# Altium PCB be_mdv.PcbDoc (part 1 of 2)
Units mm, origin at the board's own origin, x right, y up, seen from the top; angles counter-clockwise.
Board outline 120 x 100 mm, 4 copper layers (Top Layer, GND, Signal, Bottom Layer), stack 1.781 mm thick; 140 components, 157 nets, 731 pads, 195 vias.
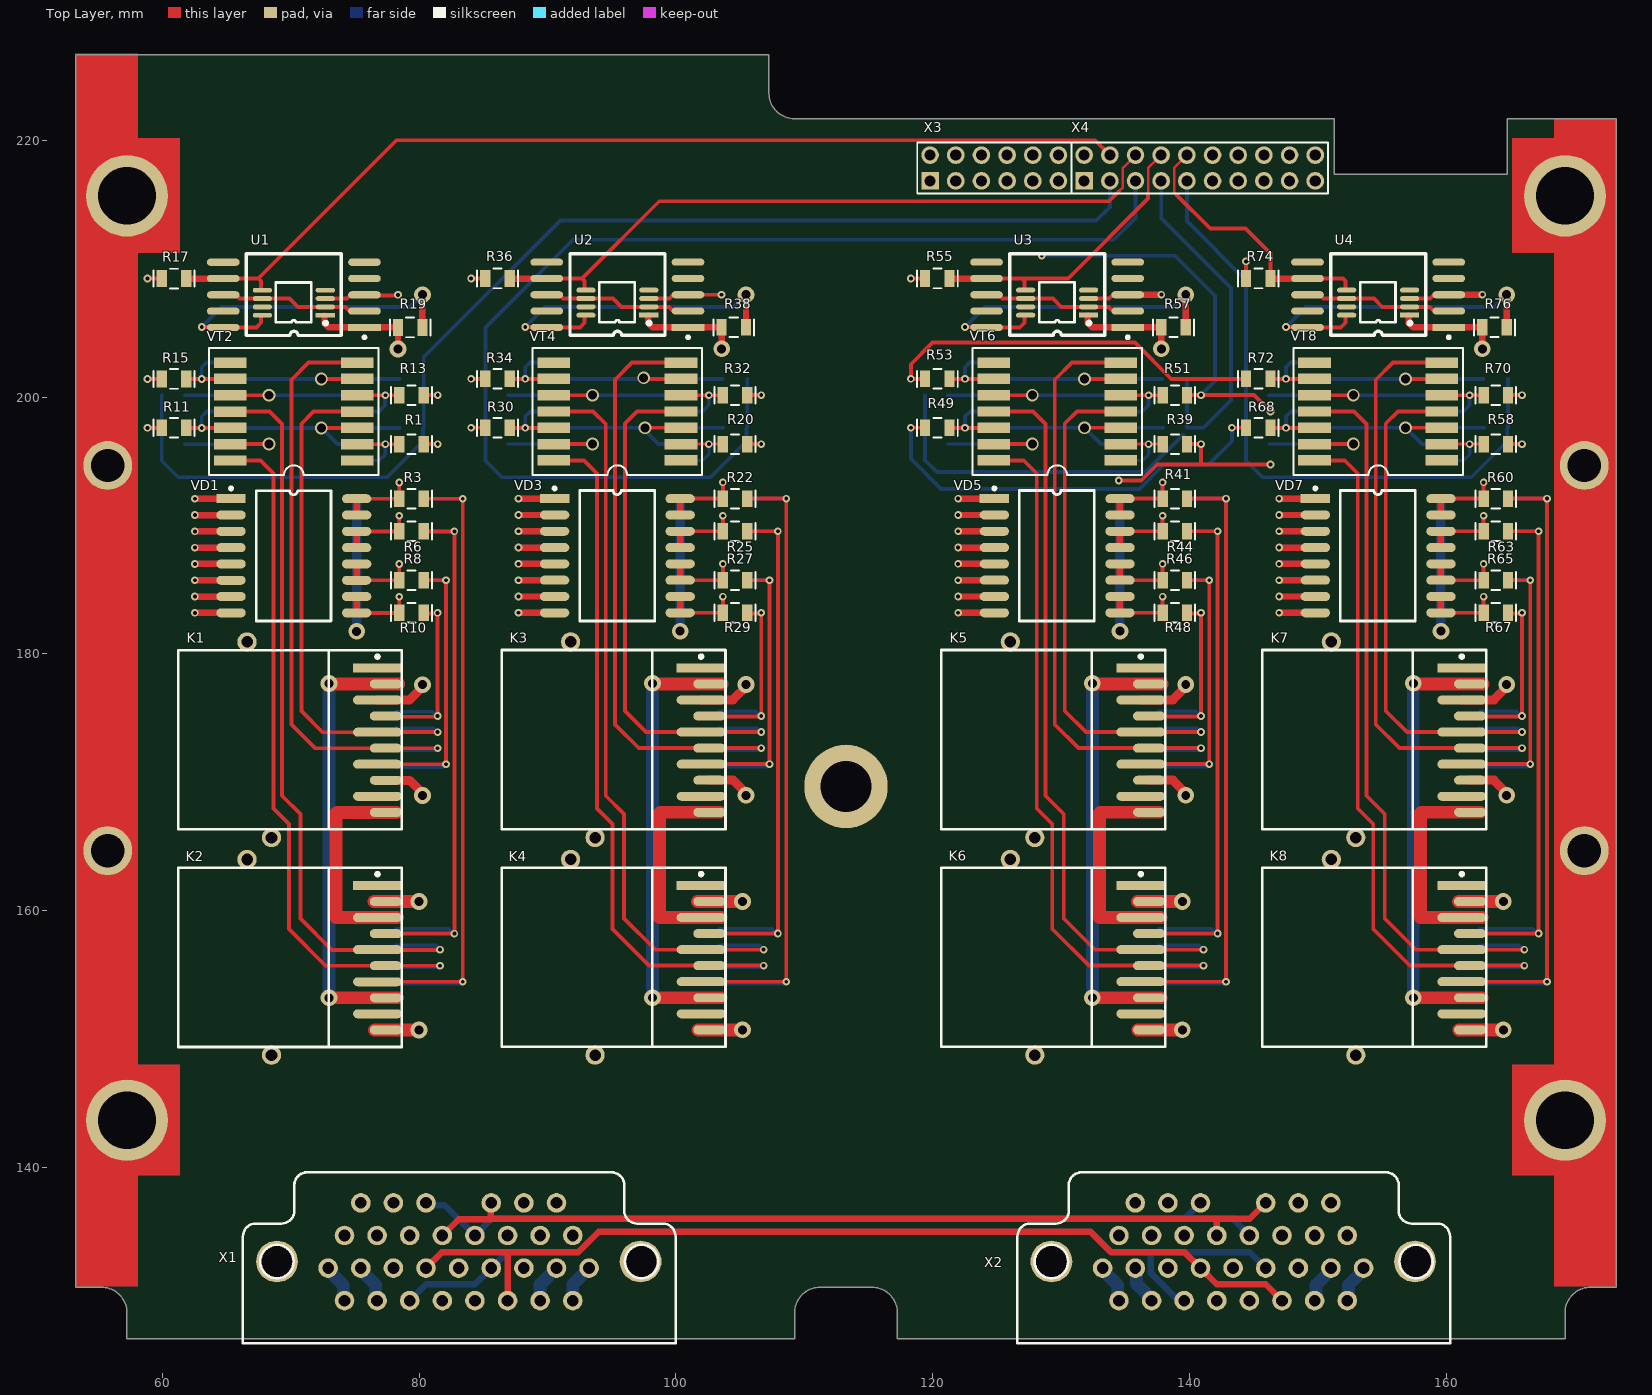
[diagram p0: Top Layer view]
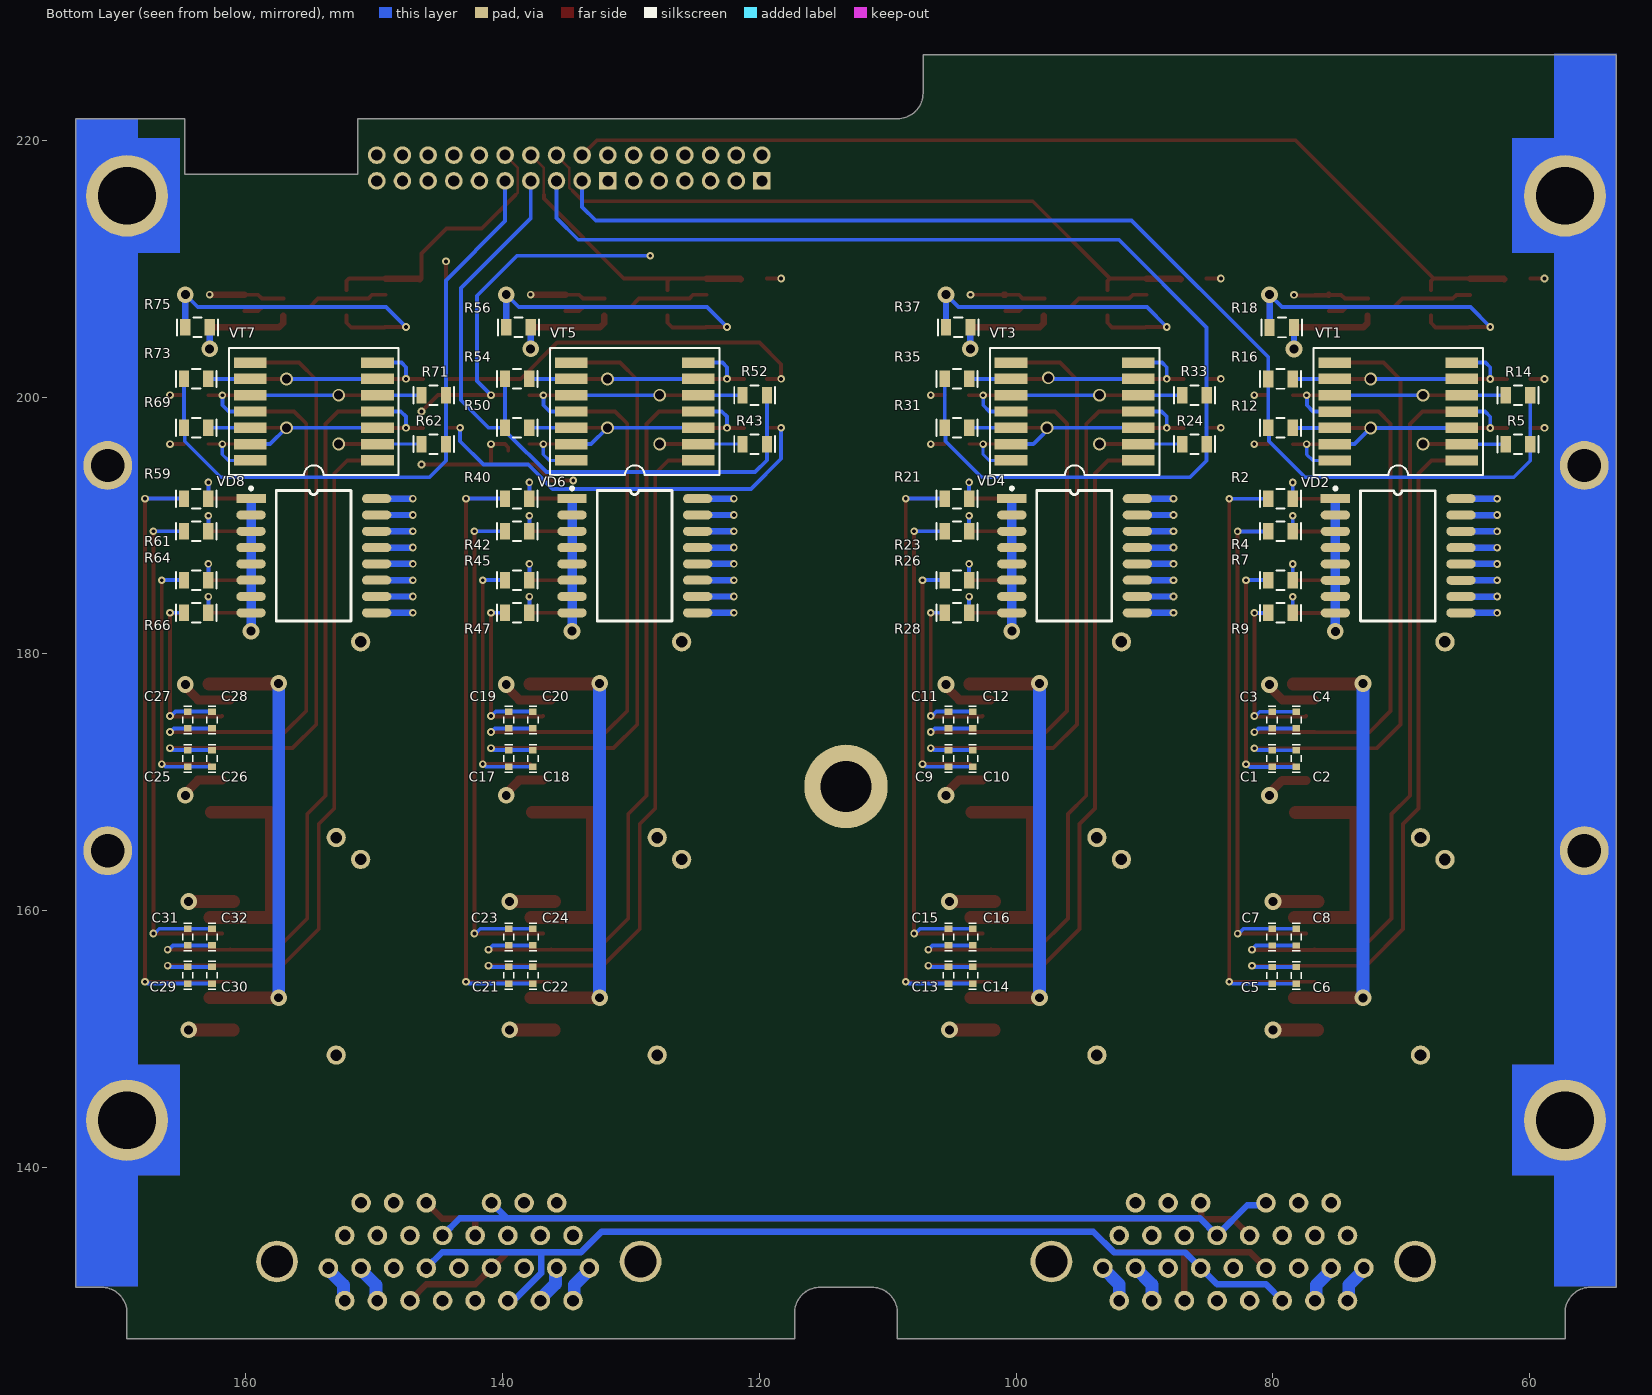
[diagram p1: Bottom Layer view, seen from below]
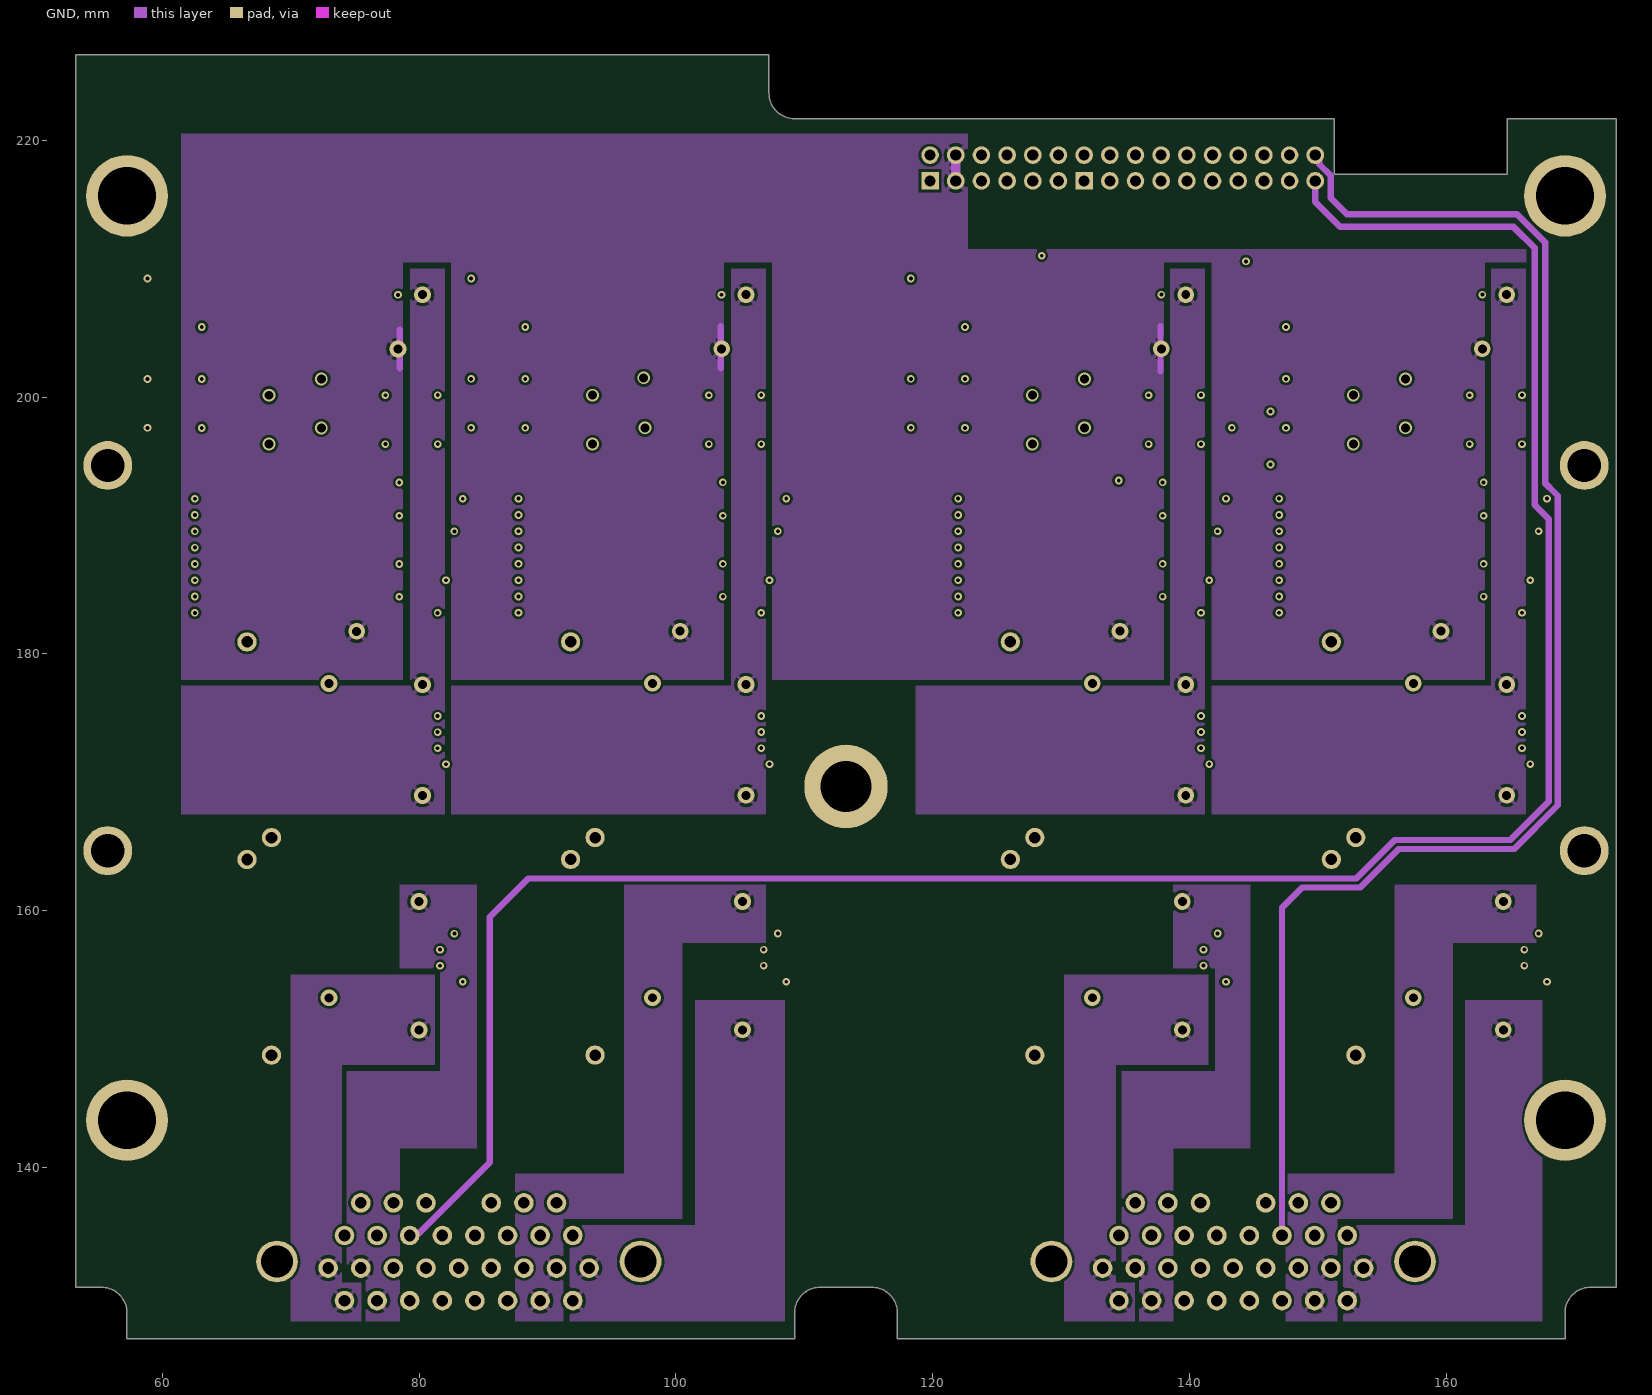
[diagram p2: GND]
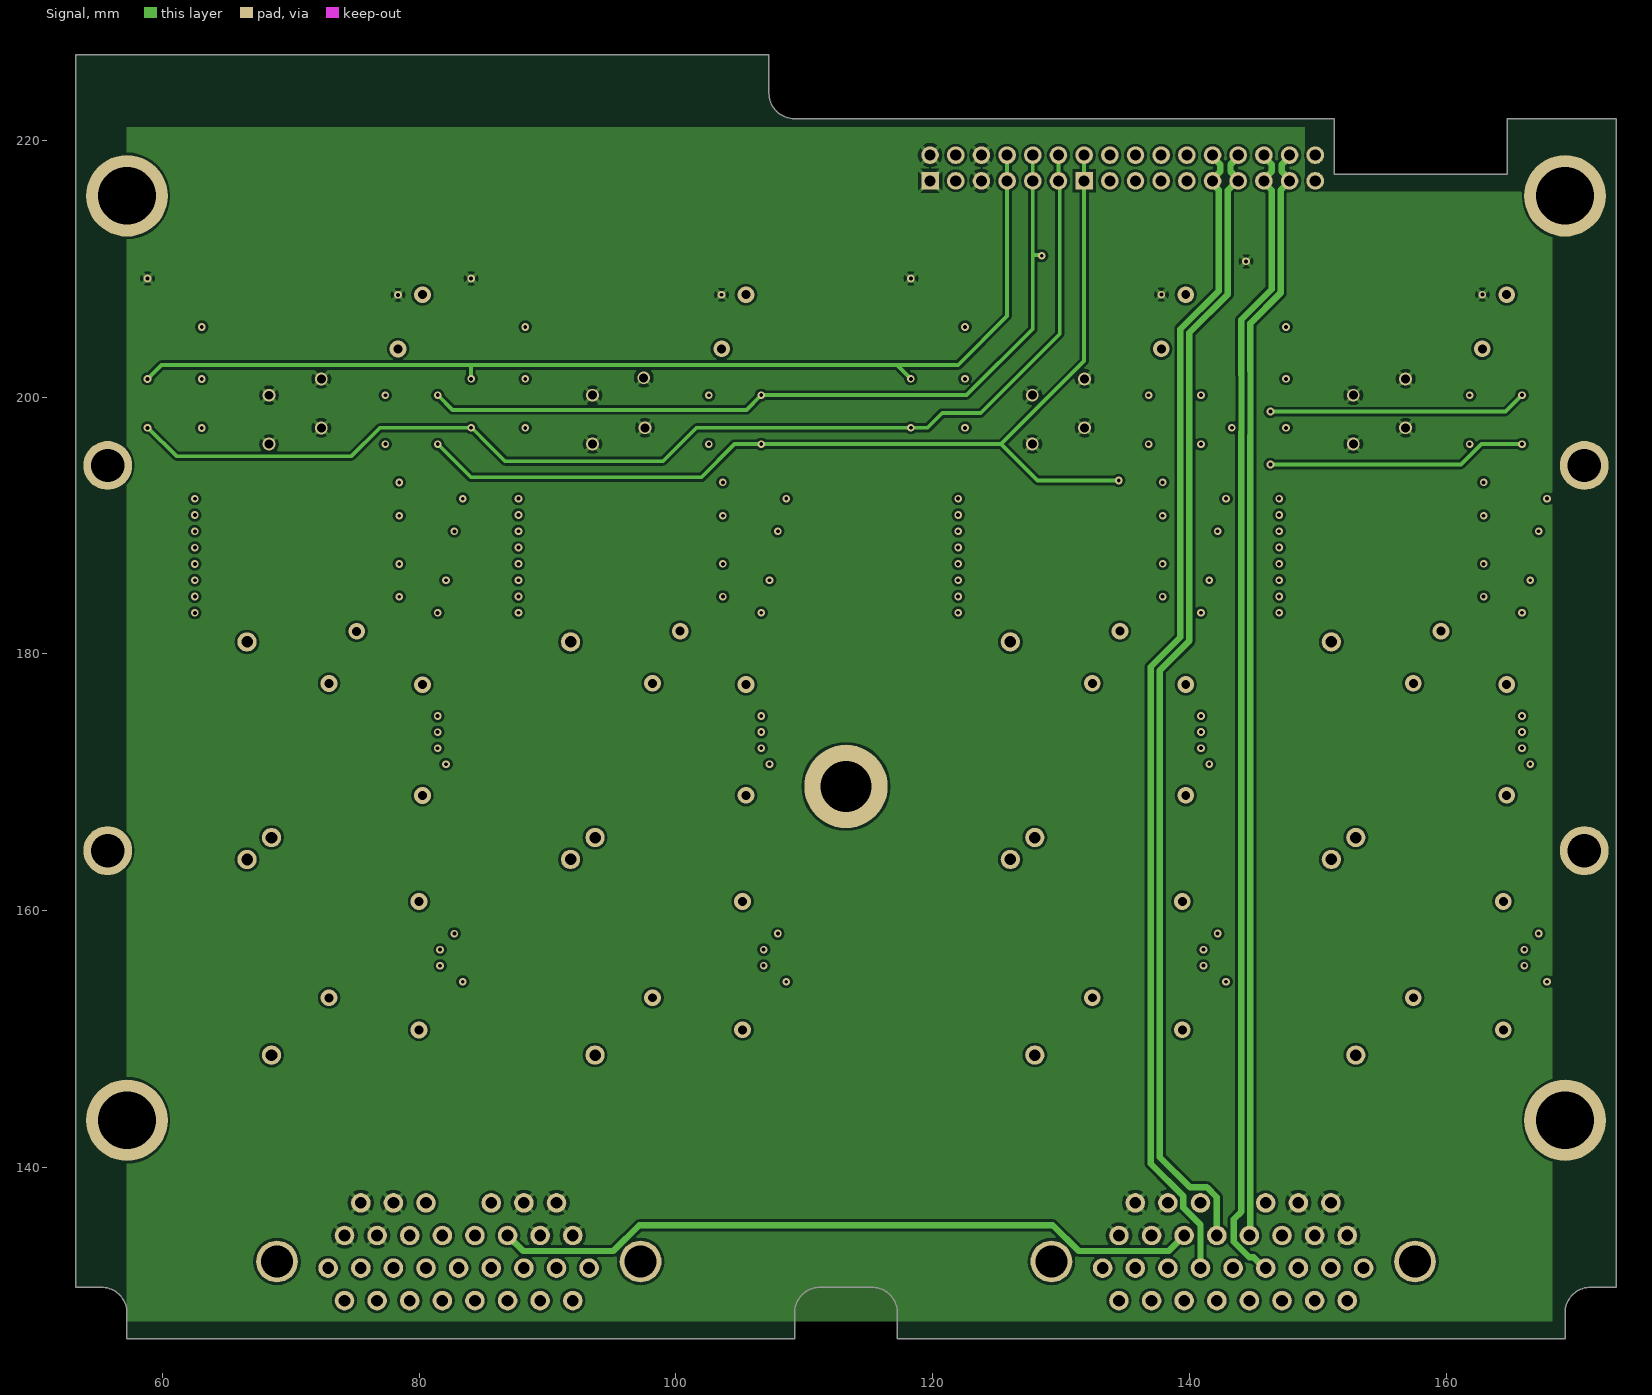
[diagram p3: Signal]
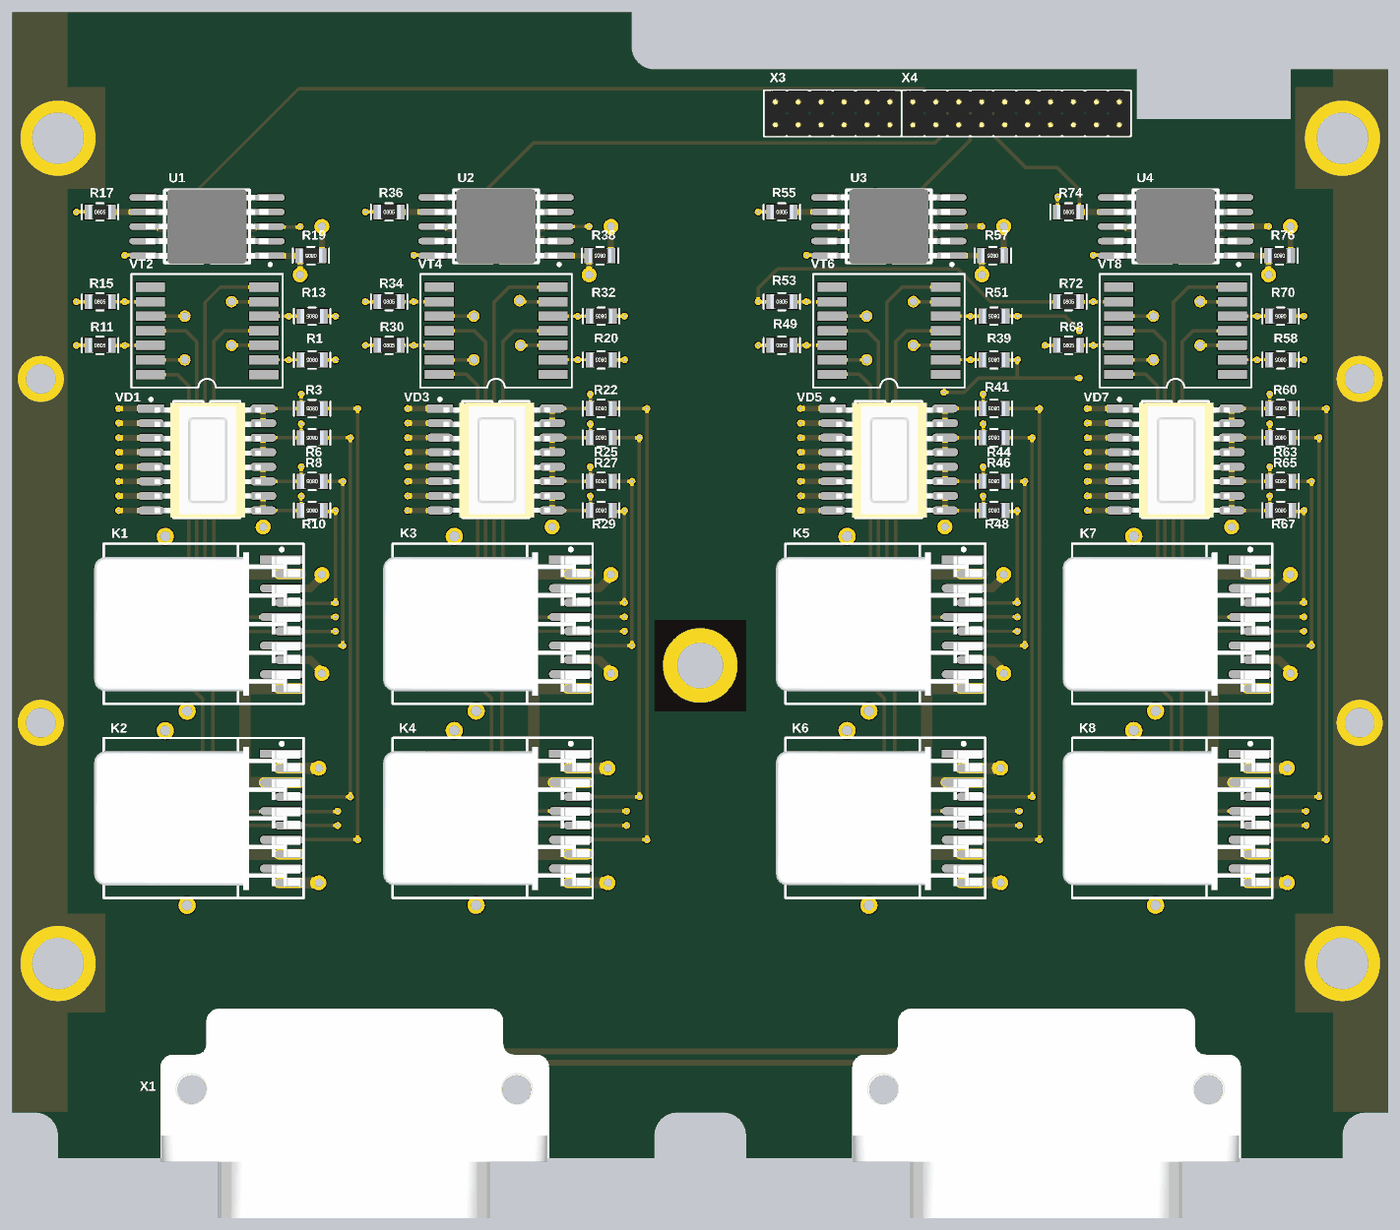
[diagram p5: 3D render of the assembled board from above, using the file's embedded part models]
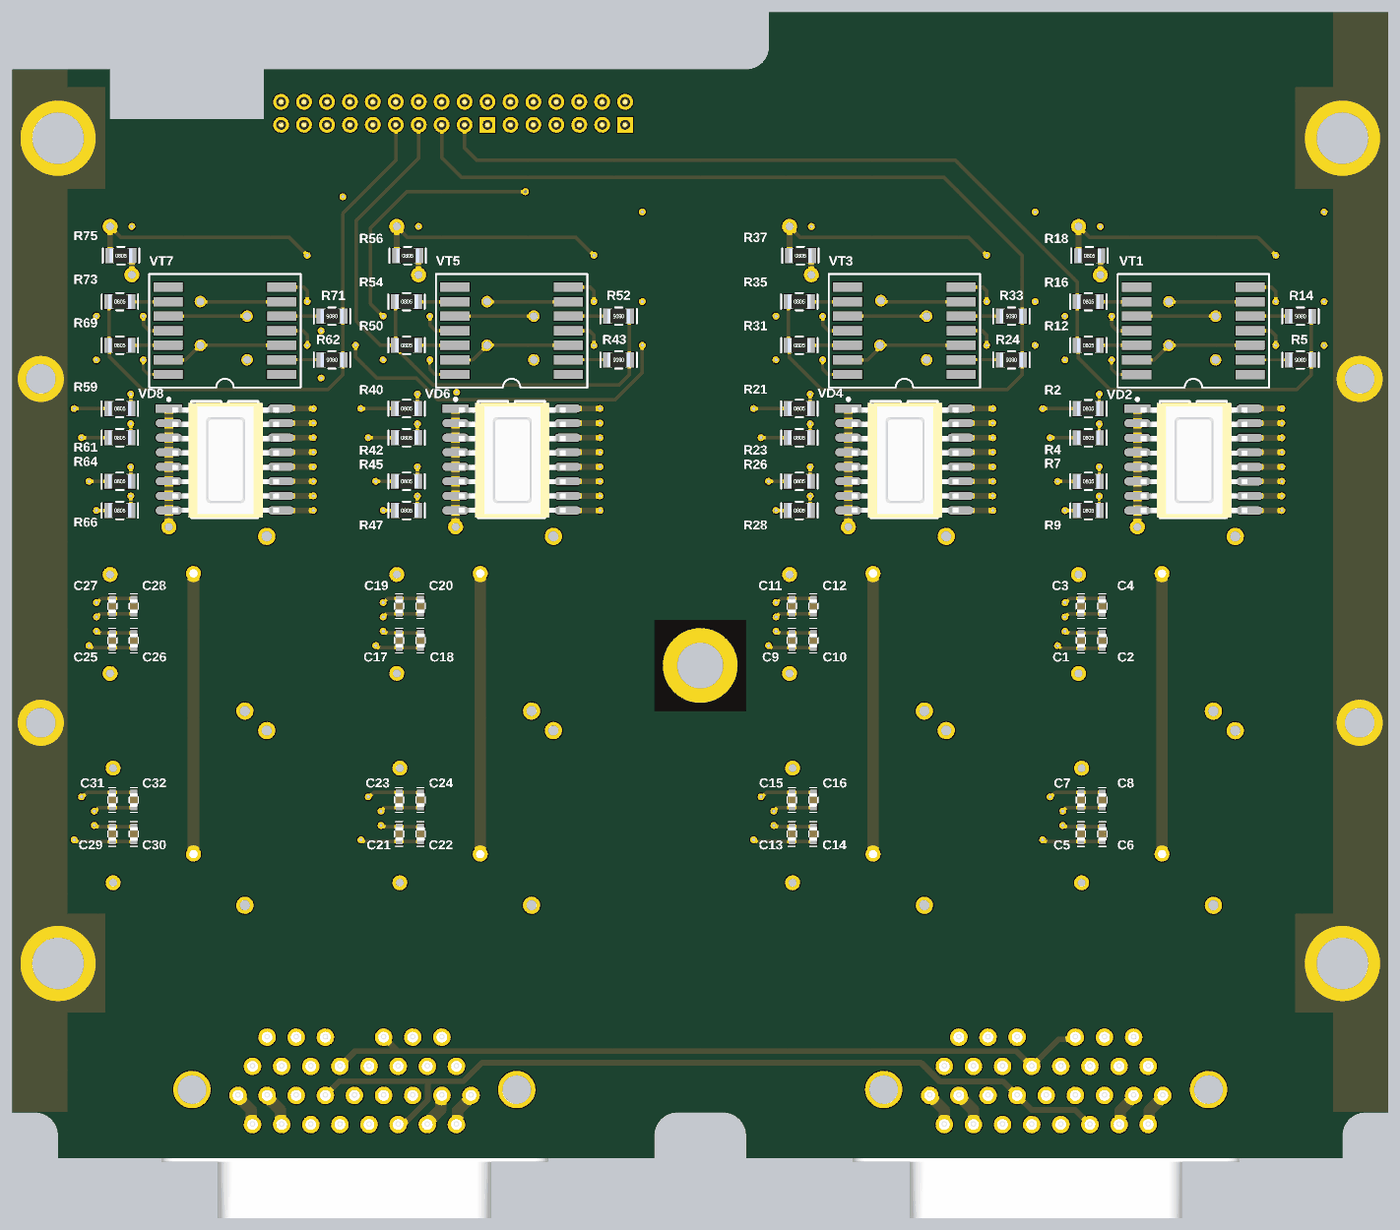
[diagram p6: 3D render of the assembled board from below, using the file's embedded part models]

## Layer stack, top to bottom
Top Solder: solder mask 0.0254, SM-001, Dk 4
Top Layer: signal copper 0.035
Dielectric 2: prepreg 0.0711, PP-006, Dk 4.1
GND: signal copper 0.035
Dielectric 1: core 1.4986, Core-043, Dk 4.3
Signal: signal copper 0.035
Dielectric 3: prepreg 0.0711, PP-006, Dk 4.1
Bottom Layer: signal copper 0.035
Bottom Solder: solder mask 0.0254, SM-001, Dk 4

## Board outline
57.255,126.67 57.255,128.67 ccw(c55.255,128.67) 55.255,130.67 53.255,130.67 53.255,226.67 107.255,226.67 107.255,223.67 ccw(c109.255,223.67) 109.255,221.67 151.299,221.67 151.299,217.348 164.761,217.348 164.761,221.67 173.255,221.67 173.255,130.67 171.255,130.67 ccw(c171.255,128.67) 169.255,128.67 169.255,126.67 117.255,126.67 117.255,128.67 ccw(c115.255,128.67) 115.255,130.67 111.255,130.67 ccw(c111.255,128.67) 109.255,128.67 109.255,126.67

## Design rules (kind name [scope] priority, off if disabled: settings)
Clearance [All] p1: gap=0.2 ignorepadtopadclearanceinfootprint=FALSE
ComponentClearance [All] p1: gap=0 collisioncheckmode=3 verticalgap=0.2 showdistances=FALSE
DiffPairsRouting [All] p1: maxlimit=0.5 minlimit=0.2 mostfreqgap=0.3 toplayer_minwidth=0.2 toplayer_maxwidth=1 toplayer_prefwidth=0.3 midlayer1_minwidth=0.2 midlayer1_maxwidth=1 midlayer1_prefwidth=0.3 midlayer2_minwidth=0.2 midlayer2_maxwidth=1 midlayer2_prefwidth=0.3 bottomlayer_minwidth=0.2 bottomlayer_maxwidth=1 bottomlayer_prefwidth=0.3 maxuncoupledlength=10
HoleSize [All] p1: absolutevalues=TRUE maxlimit=7 minlimit=0.3 maxpercent=80.000 minpercent=20.000
NetAntennae [All] p1 off: netantennaetolerance=0
PlaneClearance [All] p1: clearance=0.6
PolygonConnect "Mechanical Hole" [(ObjectKind = 'Via') And (AsMM(HoleDiameter) > 1.5) vs IsPoly] p1: connectstyle=Relief reliefconductorwidth=0.3 reliefentries=4 polygonreliefangle="45 Angle" airgapwidth=0.25
PolygonConnect [All] p2: connectstyle=Relief reliefconductorwidth=0.3 reliefentries=4 polygonreliefangle="45 Angle" airgapwidth=0.25
RoomDefinition dv_commutator_v22 [InComponentClass('dv_commutator_v22')] p1: confinementstyle=ConfineIn formatcopy=TRUE lockcomponents=FALSE outline 83.5,147.5 108.733,147.5 108.733,213 83.5,213
RoomDefinition dv_commutator_v24 [InComponentClass('dv_commutator_v24')] p2: confinementstyle=ConfineIn formatcopy=TRUE lockcomponents=TRUE outline 142.75,147.5 167.983,147.5 167.983,213 142.75,213
RoomDefinition dv_commutator_v21 [InComponentClass('dv_commutator_v21')] p3: confinementstyle=ConfineIn formatcopy=TRUE lockcomponents=FALSE outline 58.299,147.495 83.533,147.495 83.533,212.995 58.299,212.995
RoomDefinition dv_commutator_v23 [InComponentClass('dv_commutator_v23')] p4: confinementstyle=ConfineIn formatcopy=TRUE lockcomponents=FALSE outline 117.75,147.5 142.983,147.5 142.983,213 117.75,213
RoutingVias [All] p1: holewidth=0.3 width=0.6 viastyle="Through Hole" minholewidth=0.2 minwidth=0.4 maxholewidth=4 maxwidth=5 useviatemplates=TRUE viatemplateguid#1={9D0265CD-DE3E-46FD-A7A0-BEF8094407DB} viatemplatename#1=v60h30
SilkToSilkClearance [All] p1: silktosilkclearance=0.2
SilkToSolderMaskClearance SilkToSolderMaskClearance_1 [IsPad] p1: minsilkscreentomaskgap=0.254 clearancetoexposedcopper=TRUE
SilkToSolderMaskClearance [IsPad] p2: minsilkscreentomaskgap=0.2 clearancetoexposedcopper=TRUE
SolderMaskExpansion [All] p1: expansion=0.102 istentingtop=FALSE
Width [All] p1: maxlimit=2 minlimit=0.2 preferedwidth=0.2
23 further rules are at their usual default settings.

## Classes and differential pairs
net class I[1..4]: I1 I2 I3 I4
channel class mdv_commutator_v2: dv_commutator_v21 dv_commutator_v22 dv_commutator_v23 dv_commutator_v24
net class E[1..4]: E1 E2 E3 E4
net class +27В_ЦМ2_ДВ[1..4]: +27В_ЦМ2_ДВ1 +27В_ЦМ2_ДВ2 +27В_ЦМ2_ДВ3 +27В_ЦМ2_ДВ4
net class +27В_ЦМ1_ДВ[1..4]: +27В_ЦМ1_ДВ1 +27В_ЦМ1_ДВ2 +27В_ЦМ1_ДВ3 +27В_ЦМ1_ДВ4
component class dv_commutator_v24: C25 C26 C27 C28 C29 C30 C31 C32 K7 K8 R58 R59 R60 R61 R62 R63 R64 R65 R66 R67 R68 R69 R70 R71 R72 R73 R74 R75 R76 U4 VD7 VD8 VT7 VT8
component class dv_commutator_v23: C17 C18 C19 C20 C21 C22 C23 C24 K5 K6 R39 R40 R41 R42 R43 R44 R45 R46 R47 R48 R49 R50 R51 R52 R53 R54 R55 R56 R57 U3 VD5 VD6 VT5 VT6
component class dv_commutator_v22: C9 C10 C11 C12 C13 C14 C15 C16 K3 K4 R20 R21 R22 R23 R24 R25 R26 R27 R28 R29 R30 R31 R32 R33 R34 R35 R36 R37 R38 U2 VD3 VD4 VT3 VT4
component class be_mdv: X1 X2 X3 X4 Хв
component class dv_commutator_v21: C1 C2 C3 C4 C5 C6 C7 C8 K1 K2 R1 R2 R3 R4 R5 R6 R7 R8 R9 R10 R11 R12 R13 R14 R15 R16 R17 R18 R19 U1 VD1 VD2 VT1 VT2

## Components (designator, comment, footprint, x,y, rotation, side; value= is the part's Value field where it differs from the comment)
C1 "K10-79" SMD_C0402 80.066,172.495 r270 bottom value=0,22мкФ
C2 "K10-79" SMD_C0402 78.191,172.495 r270 bottom value=0,22мкФ
C3 "K10-79" SMD_C0402 80.066,174.19 r90 bottom value=0,22мкФ
C4 "K10-79" SMD_C0402 78.191,174.19 r90 bottom value=0,22мкФ
C5 "K10-79" SMD_C0402 80.066,155.608 r270 bottom value=0,22мкФ
C6 "K10-79" SMD_C0402 78.191,155.608 r270 bottom value=0,22мкФ
C7 "K10-79" SMD_C0402 80.066,157.283 r90 bottom value=0,22мкФ
C8 "K10-79" SMD_C0402 78.191,157.283 r90 bottom value=0,22мкФ
C9 "K10-79" SMD_C0402 105.266,172.5 r270 bottom value=0,22мкФ (schematic designator C1)
C10 "K10-79" SMD_C0402 103.391,172.5 r270 bottom value=0,22мкФ (schematic designator C2)
C11 "K10-79" SMD_C0402 105.266,174.195 r90 bottom value=0,22мкФ (schematic designator C3)
C12 "K10-79" SMD_C0402 103.391,174.195 r90 bottom value=0,22мкФ (schematic designator C4)
C13 "K10-79" SMD_C0402 105.266,155.613 r270 bottom value=0,22мкФ (schematic designator C5)
C14 "K10-79" SMD_C0402 103.391,155.613 r270 bottom value=0,22мкФ (schematic designator C6)
C15 "K10-79" SMD_C0402 105.266,157.288 r90 bottom value=0,22мкФ (schematic designator C7)
C16 "K10-79" SMD_C0402 103.391,157.288 r90 bottom value=0,22мкФ (schematic designator C8)
C17 "K10-79" SMD_C0402 139.516,172.5 r270 bottom value=0,22мкФ (schematic designator C1)
C18 "K10-79" SMD_C0402 137.641,172.5 r270 bottom value=0,22мкФ (schematic designator C2)
C19 "K10-79" SMD_C0402 139.516,174.195 r90 bottom value=0,22мкФ (schematic designator C3)
C20 "K10-79" SMD_C0402 137.641,174.195 r90 bottom value=0,22мкФ (schematic designator C4)
C21 "K10-79" SMD_C0402 139.516,155.613 r270 bottom value=0,22мкФ (schematic designator C5)
C22 "K10-79" SMD_C0402 137.641,155.613 r270 bottom value=0,22мкФ (schematic designator C6)
C23 "K10-79" SMD_C0402 139.516,157.288 r90 bottom value=0,22мкФ (schematic designator C7)
C24 "K10-79" SMD_C0402 137.641,157.288 r90 bottom value=0,22мкФ (schematic designator C8)
C25 "K10-79" SMD_C0402 164.516,172.5 r270 bottom value=0,22мкФ (schematic designator C1)
C26 "K10-79" SMD_C0402 162.641,172.5 r270 bottom value=0,22мкФ (schematic designator C2)
C27 "K10-79" SMD_C0402 164.516,174.195 r90 bottom value=0,22мкФ (schematic designator C3)
C28 "K10-79" SMD_C0402 162.641,174.195 r90 bottom value=0,22мкФ (schematic designator C4)
C29 "K10-79" SMD_C0402 164.516,155.613 r270 bottom value=0,22мкФ (schematic designator C5)
C30 "K10-79" SMD_C0402 162.641,155.613 r270 bottom value=0,22мкФ (schematic designator C6)
C31 "K10-79" SMD_C0402 164.516,157.288 r90 bottom value=0,22мкФ (schematic designator C7)
C32 "K10-79" SMD_C0402 162.641,157.288 r90 bottom value=0,22мкФ (schematic designator C8)
K1 "RPS45-1-T-OS" RPS-45-1 76.766,178.895 r270 top
K2 "RPS45-1-T-OS" RPS-45-1 76.766,161.951 r270 top
K3 "RPS45-1-T-OS" RPS-45-1 101.966,178.9 r270 top (schematic designator K1)
K4 "RPS45-1-T-OS" RPS-45-1 101.966,161.956 r270 top (schematic designator K2)
K5 "RPS45-1-T-OS" RPS-45-1 136.216,178.9 r270 top (schematic designator K1)
K6 "RPS45-1-T-OS" RPS-45-1 136.216,161.956 r270 top (schematic designator K2)
K7 "RPS45-1-T-OS" RPS-45-1 161.216,178.9 r270 top (schematic designator K1)
K8 "RPS45-1-T-OS" RPS-45-1 161.216,161.956 r270 top (schematic designator K2)
R1 "OSM R1-12" SMD_0805 80.366,196.329 r180 top value=1к (schematic designator R3)
R2 "OSM R1-12" SMD_0805 80.366,192.079 r180 bottom value=560 (schematic designator R1)
R3 "OSM R1-12" SMD_0805 80.366,192.079 r180 top value=560 (schematic designator R2)
R4 "OSM R1-12" SMD_0805 80.366,189.539 r180 bottom value=560
R5 "OSM R1-12" SMD_0805 59.966,196.329 r0 bottom value=10k (schematic designator R6)
R6 "OSM R1-12" SMD_0805 80.366,189.539 r180 top value=560 (schematic designator R5)
R7 "OSM R1-12" SMD_0805 80.366,185.729 r180 bottom value=560
R8 "OSM R1-12" SMD_0805 80.366,185.729 r180 top value=560
R9 "OSM R1-12" SMD_0805 80.366,183.189 r180 bottom value=560
R10 "OSM R1-12" SMD_0805 80.366,183.189 r180 top value=560
R11 "OSM R1-12" SMD_0805 59.966,197.599 r0 top value=1к
R12 "OSM R1-12" SMD_0805 80.366,197.599 r180 bottom value=10k
R13 "OSM R1-12" SMD_0805 80.366,200.139 r180 top value=1к
R14 "OSM R1-12" SMD_0805 59.966,200.139 r0 bottom value=10k
R15 "OSM R1-12" SMD_0805 59.966,201.409 r0 top value=1к
R16 "OSM R1-12" SMD_0805 80.366,201.409 r180 bottom value=10k
R17 "OSM R1-12" SMD_0805 59.966,209.23 r0 top value=50к
R18 "OSM R1-12" SMD_0805 80.266,205.42 r180 bottom value=1
R19 "OSM R1-12" SMD_0805 80.266,205.42 r180 top value=1
R20 "OSM R1-12" SMD_0805 105.566,196.334 r180 top value=1к (schematic designator R3)
R21 "OSM R1-12" SMD_0805 105.566,192.084 r180 bottom value=560 (schematic designator R1)
R22 "OSM R1-12" SMD_0805 105.566,192.084 r180 top value=560 (schematic designator R2)
R23 "OSM R1-12" SMD_0805 105.566,189.544 r180 bottom value=560 (schematic designator R4)
R24 "OSM R1-12" SMD_0805 85.166,196.334 r0 bottom value=10k (schematic designator R6)
R25 "OSM R1-12" SMD_0805 105.566,189.544 r180 top value=560 (schematic designator R5)
R26 "OSM R1-12" SMD_0805 105.566,185.734 r180 bottom value=560 (schematic designator R7)
R27 "OSM R1-12" SMD_0805 105.566,185.734 r180 top value=560 (schematic designator R8)
R28 "OSM R1-12" SMD_0805 105.566,183.194 r180 bottom value=560 (schematic designator R9)
R29 "OSM R1-12" SMD_0805 105.566,183.194 r180 top value=560 (schematic designator R10)
R30 "OSM R1-12" SMD_0805 85.166,197.604 r0 top value=1к (schematic designator R11)
R31 "OSM R1-12" SMD_0805 105.566,197.604 r180 bottom value=10k (schematic designator R12)
R32 "OSM R1-12" SMD_0805 105.566,200.144 r180 top value=1к (schematic designator R13)
R33 "OSM R1-12" SMD_0805 85.166,200.144 r0 bottom value=10k (schematic designator R14)
R34 "OSM R1-12" SMD_0805 85.166,201.414 r0 top value=1к (schematic designator R15)
R35 "OSM R1-12" SMD_0805 105.566,201.414 r180 bottom value=10k (schematic designator R16)
R36 "OSM R1-12" SMD_0805 85.166,209.235 r0 top value=50к (schematic designator R17)
R37 "OSM R1-12" SMD_0805 105.466,205.425 r180 bottom value=1 (schematic designator R18)
R38 "OSM R1-12" SMD_0805 105.466,205.425 r180 top value=1 (schematic designator R19)
R39 "OSM R1-12" SMD_0805 139.816,196.334 r180 top value=1к (schematic designator R3)
R40 "OSM R1-12" SMD_0805 139.816,192.084 r180 bottom value=560 (schematic designator R1)
R41 "OSM R1-12" SMD_0805 139.816,192.084 r180 top value=560 (schematic designator R2)
R42 "OSM R1-12" SMD_0805 139.816,189.544 r180 bottom value=560 (schematic designator R4)
R43 "OSM R1-12" SMD_0805 119.416,196.334 r0 bottom value=10k (schematic designator R6)
R44 "OSM R1-12" SMD_0805 139.816,189.544 r180 top value=560 (schematic designator R5)
R45 "OSM R1-12" SMD_0805 139.816,185.734 r180 bottom value=560 (schematic designator R7)
R46 "OSM R1-12" SMD_0805 139.816,185.734 r180 top value=560 (schematic designator R8)
R47 "OSM R1-12" SMD_0805 139.816,183.194 r180 bottom value=560 (schematic designator R9)
R48 "OSM R1-12" SMD_0805 139.816,183.194 r180 top value=560 (schematic designator R10)
R49 "OSM R1-12" SMD_0805 119.416,197.604 r0 top value=1к (schematic designator R11)
R50 "OSM R1-12" SMD_0805 139.816,197.604 r180 bottom value=10k (schematic designator R12)
R51 "OSM R1-12" SMD_0805 139.816,200.144 r180 top value=1к (schematic designator R13)
R52 "OSM R1-12" SMD_0805 119.416,200.144 r0 bottom value=10k (schematic designator R14)
R53 "OSM R1-12" SMD_0805 119.416,201.414 r0 top value=1к (schematic designator R15)
R54 "OSM R1-12" SMD_0805 139.816,201.414 r180 bottom value=10k (schematic designator R16)
R55 "OSM R1-12" SMD_0805 119.416,209.235 r0 top value=50к (schematic designator R17)
R56 "OSM R1-12" SMD_0805 139.716,205.425 r180 bottom value=1 (schematic designator R18)
R57 "OSM R1-12" SMD_0805 139.716,205.425 r180 top value=1 (schematic designator R19)
R58 "OSM R1-12" SMD_0805 164.816,196.334 r180 top value=1к (schematic designator R3)
R59 "OSM R1-12" SMD_0805 164.816,192.084 r180 bottom value=560 (schematic designator R1)
R60 "OSM R1-12" SMD_0805 164.816,192.084 r180 top value=560 (schematic designator R2)
R61 "OSM R1-12" SMD_0805 164.816,189.544 r180 bottom value=560 (schematic designator R4)
R62 "OSM R1-12" SMD_0805 144.416,196.334 r0 bottom value=10k (schematic designator R6)
R63 "OSM R1-12" SMD_0805 164.816,189.544 r180 top value=560 (schematic designator R5)
R64 "OSM R1-12" SMD_0805 164.816,185.734 r180 bottom value=560 (schematic designator R7)
R65 "OSM R1-12" SMD_0805 164.816,185.734 r180 top value=560 (schematic designator R8)
R66 "OSM R1-12" SMD_0805 164.816,183.194 r180 bottom value=560 (schematic designator R9)
R67 "OSM R1-12" SMD_0805 164.816,183.194 r180 top value=560 (schematic designator R10)
R68 "OSM R1-12" SMD_0805 144.416,197.604 r0 top value=1к (schematic designator R11)
R69 "OSM R1-12" SMD_0805 164.816,197.604 r180 bottom value=10k (schematic designator R12)
R70 "OSM R1-12" SMD_0805 164.816,200.144 r180 top value=1к (schematic designator R13)
R71 "OSM R1-12" SMD_0805 144.416,200.144 r0 bottom value=10k (schematic designator R14)
R72 "OSM R1-12" SMD_0805 144.416,201.414 r0 top value=1к (schematic designator R15)
R73 "OSM R1-12" SMD_0805 164.816,201.414 r180 bottom value=10k (schematic designator R16)
R74 "OSM R1-12" SMD_0805 144.416,209.235 r0 top value=50к (schematic designator R17)
R75 "OSM R1-12" SMD_0805 164.716,205.425 r180 bottom value=1 (schematic designator R18)
R76 "OSM R1-12" SMD_0805 164.716,205.425 r180 top value=1 (schematic designator R19)
U1 "1487UD2U" FlatPack-10_MSOP-8 75.75,205.42 r180 top
U2 "1487UD2U" FlatPack-10_MSOP-8 100.951,205.425 r180 top (schematic designator U1)
U3 "1487UD2U" FlatPack-10_MSOP-8 135.201,205.425 r180 top (schematic designator U1)
U4 "1487UD2U" FlatPack-10_MSOP-8 160.201,205.425 r180 top (schematic designator U1)
VD1 "2DS627A OSM" 401.16-3 65.36,192.079 r0 top
VD2 "2DS627A OSM" 401.16-3 75.139,192.079 r180 bottom
VD3 "2DS627A OSM" 401.16-3 90.561,192.084 r0 top (schematic designator VD1)
VD4 "2DS627A OSM" 401.16-3 100.34,192.084 r180 bottom (schematic designator VD2)
VD5 "2DS627A OSM" 401.16-3 124.811,192.084 r0 top (schematic designator VD1)
VD6 "2DS627A OSM" 401.16-3 134.59,192.084 r180 bottom (schematic designator VD2)
VD7 "2DS627A OSM" 401.16-3 149.811,192.084 r0 top (schematic designator VD1)
VD8 "2DS627A OSM" 401.16-3 159.59,192.084 r180 bottom (schematic designator VD2)
VT1 "1NT251A2 OS" FLATPACK-14.PCBLIB 65.297,195.059 r0 bottom (schematic designator VT2)
VT2 "1NT251A2 OS" FLATPACK-14.PCBLIB 75.203,195.059 r180 top (schematic designator VT1)
VT3 "1NT251A2 OS" FLATPACK-14.PCBLIB 90.498,195.064 r0 bottom (schematic designator VT2)
VT4 "1NT251A2 OS" FLATPACK-14.PCBLIB 100.404,195.064 r180 top (schematic designator VT1)
VT5 "1NT251A2 OS" FLATPACK-14.PCBLIB 124.748,195.064 r0 bottom (schematic designator VT2)
VT6 "1NT251A2 OS" FLATPACK-14.PCBLIB 134.654,195.064 r180 top (schematic designator VT1)
VT7 "1NT251A2 OS" FLATPACK-14.PCBLIB 149.748,195.064 r0 bottom (schematic designator VT2)
VT8 "1NT251A2 OS" FLATPACK-14.PCBLIB 159.654,195.064 r180 top (schematic designator VT1)
X1 "SNP411-31" SNP411-31 97.255,132.67 r180 top
X2 "SNP411-31" SNP411-31 157.575,132.67 r180 top
X3 "Header 2X12" PLD2-12 119.803,216.84 r90 top
X4 "Header 2X20" PLD2-20 131.803,216.84 r90 top

## Footprints (in the part's own frame and the unit in brackets; to place one, negate y for a bottom-side part, rotate by r counter-clockwise, add the part's x,y. Pads: shape width x height; smd on the part's side, far side on the other; paste and mask are expansions set on the pad)
401.16-3 [mil]
  rect 90x27.56 smd: 1(0,0)
  oval 90x27.56 smd: 2(0,-50) 3(0,-100) 4(0,-150) 5(0,-200) 6(0,-250) 7(0,-300) 8(0,-350) 9(385,-350) 10(385,-300) 11(385,-250) 12(385,-200) 13(385,-150) 14(385,-100) 15(385,-50) 16(385,0)
  silkscreen extent -4,-375 306,36, body extent 12,-374 378,20, height 100
FlatPack-10_MSOP-8 [mm]
  rect 2.54x0.559 smd: 1(0,0)
  rect 1.5x0.38 smd: 1(3.05,-0.95)
  oval 2.54x0.559 smd: 2(0,-1.27) 3(0,-2.54) 4(0,-3.81) 5(0,-5.08) 6(11,-5.08) 7(11,-3.81) 8(11,-2.54) 9(11,-1.27) 10(11,0)
  oval 1.5x0.38 smd: 2(3.05,-1.6) 3(3.05,-2.25) 4(3.05,-2.9) 7(7.95,-2.9) 8(7.95,-2.25) 9(7.95,-1.6) 10(7.95,-0.95)
  silkscreen extent -0.1,-5.73 9.2,0.87, body extent 0.15,-5.8 10.85,0.7, height 2
FLATPACK-14.PCBLIB [mil]
  rect 100x32 smd: 1(0,0) 2(0,-50) 3(0,-100) 4(0,-150) 5(0,-200) 6(0,-250) 7(0,-300) 8(390,-300) 9(390,-250) 10(390,-200) 11(390,-150) 12(390,-100) 13(390,-50) 14(390,0)
  silkscreen extent -65,-345 455,45
PLD2-12 [mil]
  rect 54x54 hole 34: 1(0,0)
  round 54 hole 34: 2(78.74,0) 3(0,-78.74) 4(78.74,-78.74) 5(0,-157.48) 6(78.74,-157.48) 7(0,-236.22) 8(78.74,-236.22) 9(0,-314.96) 10(78.74,-314.96) 11(0,-393.7) 12(78.74,-393.7)
  silkscreen extent -39,-433 118,39, body extent -39,-429 118,35, height 236
PLD2-20 [mil]
  rect 54x54 hole 34: 1(0,0)
  round 54 hole 34: 2(78.74,0) 3(0,-78.74) 4(78.74,-78.74) 5(0,-157.48) 6(78.74,-157.48) 7(0,-236.22) 8(78.74,-236.22) 9(0,-314.96) 10(78.74,-314.96) 11(0,-393.7) 12(78.74,-393.7) 13(0,-472.44) 14(78.74,-472.44) 15(0,-551.18) 16(78.74,-551.18) 17(0,-629.92) 18(78.74,-629.92) 19(0,-708.66) 20(78.74,-708.66)
  silkscreen extent -39,-748 118,39, body extent -39,-744 118,35, height 232
RPS-45-1 [mm]
  rect 0.7x3.8 smd: 1(-0.007,0)
  oval 0.7x3.8 smd: 2(2.493,0) 3(4.993,0) 4(7.493,0) 5(9.993,0)
  oval 0.7x2.5 smd: 6(11.243,0.65) 7(8.743,0.65) 8(6.243,0.65) 9(3.743,0.65) 10(1.243,0.65)
  round 1.5 hole 0.9: 11(13.208,-8.255) 12(-2.032,-10.16)
  silkscreen extent -1.4,-15.53 12.57,1.91, body extent -0.63,-16.37 11.87,1.63, height 6.5
SMD_0805 [mm]
  rect 0.8x1.3 smd: 1(0,0) 2(1.9,0)
  silkscreen extent -0.64,-0.76 2.54,0.76, body extent -0.05,-0.62 1.95,0.63, height 0.43
SMD_C0402 [mm]
  rect 0.5x0.6 smd: 1(0,0) 2(1.3,0)
  silkscreen extent -0.43,-0.4 1.73,0.4, body extent 0.05,-0.35 1.25,0.35, height 0.7
SNP411-31 [mil]
  round 60 hole 36: 1(957.87,20.08) 2(907.87,120.08) 3(857.87,20.08) 4(807.87,120.08) 5(757.87,20.08) 6(707.87,120.08) 7(657.87,20.08) 8(607.87,120.08) 9(507.87,120.08) 10(457.87,20.08) 11(407.87,120.08) 12(357.87,20.08) 13(307.87,120.08) 14(257.87,20.08) 15(207.87,120.08) 16(157.87,20.08) 17(907.87,-79.92) 18(857.87,-179.92) 19(807.87,-79.92) 20(757.87,-179.92) 21(707.87,-79.92) 22(657.87,-179.92) 23(607.87,-79.92) 24(557.87,20.08) 25(507.87,-79.92) 26(457.87,-179.92) 27(407.87,-79.92) 28(357.87,-179.92) 29(307.87,-79.92) 30(207.87,-79.92) 31(257.87,-179.92)
  round 128 hole 98.43: MH1(0,0) MH2(1114.96,0)
  silkscreen extent -107,-274 1219,250, body extent -106,-276 1221,441, height 311

## Part data
C1 C2 C3 C4 C5 C6 C7 C8 C9 C10 C11 C12 C13 C14 C15 C16 C17 C18 C19 C20 C21 C22 C23 C24 C25 C26 C27 C28 C29 C30 C31 C32: library part Capacitor, "Capacitor", Назначение=SMD-конденсатор, Наименование=К10-79, Напряжение=В, Потребление, Вт=0, Точность=%
K1 K2 K3 K4 K5 K6 K7 K8: library part RPS45, "Реле поляризованное", ComponentLink1Description=DataSheet, ComponentLink1URL=https://relays.ru/files/catalog/rps45.pdf, Назначение="Реле поляризованное", Наименование="РПС45-1-Т-ОС РС4.520.756-11", Потребление, Вт=0,000
R1 R2 R3 R4 R5 R6 R7 R8 R9 R10 R11 R12 R13 R14 R15 R16 R17 R18 R19 R20 R21 R22 R23 R24 R25 R26 R27 R28 R29 R30 R31 R32 R33 R34 R35 R36 R37 R38 R39 R40 R41 R42 R43 R44 R45 R46 R47 R48 R49 R50 R51 R52 R53 R54 R55 R56 R57 R58 R59 R60 R61 R62 R63 R64 R65 R66 R67 R68 R69 R70 R71 R72 R73 R74 R75 R76: library part Resistor, "Resistor", Назначение=SMD-резистор, Наименование="ОСМ Р1-12", Потребление, Вт=0,001, Точность=%
U1 U2 U3 U4: library part AD8212S, Назначение="Токовый датчик", Наименование="1487УД2У \"ВП\""
VD1 VD2 VD3 VD4 VD5 VD6 VD7 VD8: library part 2DS627A, "Диодная матрица", ComponentLink1Description=DataSheet, ComponentLink1URL=https://www.integral.by/sites/default/files/pdf/2ds627a.pdf, Назначение="Диодная матрица", Наименование="2ДС627А \"ОСМ\"", Потребление, Вт=0,0
VT1 VT2 VT3 VT4 VT5 VT6 VT7 VT8: "Транзисторная сборка", Назначение="Транзисторная сборка", Наименование="1НТ251А2 ОС"
X1 X2: library part СНП411-31, "СНП411-31, распиновка со стороны платы", Назначение="Соединитель угловой на плату", Наименование=СНП411-31
X3: "Header, 12-Pin, Dual row", Назначение="Header, 12-Pin, Dual row", Наименование=PLD2-12, Потребление, Вт=0,0
X4: "Header, 20-Pin, Dual row", Назначение="Header, 20-Pin, Dual row", Наименование=PLD2-20, Потребление, Вт=0,0

## Free pads (board coordinates)
  round 3.81 hole 2.6: 0(55.755,164.67) 0(55.755,194.67) 0(170.755,164.67) 0(170.755,194.67)
  round 6.35 hole 4.5: 0(57.255,143.67) 0(57.255,215.67) 0(169.255,143.67) 0(169.255,215.67)
  round 6.502 hole 4: 0(113.255,169.67)

## Via types
v1: diameter 0.6, hole 0.3, Top Layer to Bottom Layer, 143 vias
v2: diameter 1.3, hole 0.7, Top Layer to Bottom Layer, 36 vias
v3: diameter 1, hole 0.7, Top Layer to Bottom Layer, 16 vias

## Nets (pads, with @x,y where several pads share a name; then routed paths per layer and width w, separated by ;. In a path a pad name is that pad's centre, name@x,y a point inside that pad or via, vN(x,y) a via of type N, cw(c..) or ccw(c..) an arc to the next point about the centre after c; other vN are vias at no path point)
1-ОСН_О: X1.22 X1.25 X2.22 X2.25 X4.17 X4.18 | length 153.9
  Signal w0.5: X2.25@144.675,134.7 144.733,134.758 144.733,196.978 144.758,197.004 144.758,202.015 144.733,202.04 144.733,205.733 147.103,208.103 147.103,216.111 147.803,216.811 147.803,216.969 147.203,217.569 147.203,218.111 147.803,218.711 X4.18@147.803,218.84
  Bottom Layer w0.5: X1.22@80.545,137.24 80.741,137.044 82.011,137.044 X1.25@84.355,134.7 85.683,136.028 139.653,136.028 ; X2.22@140.865,137.24 139.653,136.028 ; X2.25@144.675,134.7 143.347,136.028 139.653,136.028
1-ОСН_П: X1.6 X1.10 X2.6 X2.10 X4.15 X4.16 | length 165.1
  Signal w0.5: X4.16@145.803,218.84 145.803,218.711 146.403,218.111 146.403,217.569 145.803,216.969 X4.15@145.803,216.84 145.803,216.711 146.403,216.111 146.403,208.393 144.033,206.023 144.033,201.75 144.058,201.725 144.058,197.294 144.033,197.268 144.033,136.533 143.463,135.963 143.463,134.198 144.661,133 145,133 145.84,132.16 X2.10@145.945,132.16
  Bottom Layer w0.5: X1.6@79.275,129.62 80.545,130.89 84.355,130.89 X1.10@85.625,132.16 86.837,133.372 92.372,133.372 94,135 132.3,135 133.898,133.402 144.703,133.402 X2.10@145.945,132.16 ; 137,133.328 137,131.771 139.151,129.62 X2.6@139.595,129.62
2-РЕЗ_О: X1.23 X1.26 X2.23 X2.26 X4.13 X4.14 | length 157.6
  Top Layer w0.5: X1.23@81.815,134.7 83.085,135.97 85.6,135.97 85.6,135.995 ; X1.26@85.625,137.24 85.6,137.215 85.6,135.995 ; X2.23@142.135,134.7 142.135,135.995 ; X2.26@145.945,137.24 144.7,135.995 142.135,135.995 ; 85.6,135.995 142.135,135.995
  Signal w0.5: X2.23@142.135,134.7 142.135,137.684 141.367,138.452 140.048,138.452 137.7,140.8 137.7,178.7 140,181 140,205 143,208 143,216.111 143.729,216.84 X4.13@143.803,216.84 ; X4.13@143.803,216.803 143.803,216.969 143.203,217.569 143.203,218.111 143.803,218.711 X4.14@143.803,218.84
2-РЕЗ_П: X1.7 X1.11 X2.7 X2.11 X4.11 X4.12 | length 165.1
  Top Layer w0.5: X1.7@80.545,132.16 81.785,133.4 87.092,133.4 ; X1.11@86.895,129.62 86.895,133.202 87.092,133.4 ; X2.11@147.215,129.62 145.945,130.89 142.135,130.89 X2.7@140.865,132.16 139.625,133.4 133.9,133.4 132.3,135 94,135 92.4,133.4 87.092,133.4
  Signal w0.5: X2.7@140.865,132.16 140.865,135.526 139.537,136.854 139.537,137.742 137,140.279 137,179 139.3,181.3 139.3,205.29 142.3,208.29 142.3,216.111 141.803,216.608 141.803,216.969 142.403,217.569 142.403,218.111 141.803,218.711 X4.12@141.803,218.84
+27В_ЦМ1_ДВ1: K2.6 X1.1 X1.2 | length 6.6
  Top Layer w1: K2.6@76.523,150.69 79.982,150.69 v2(80,150.708)
  Bottom Layer w1: X1.1@72.925,132.16 72.925,132.018 74.095,130.848 74.095,129.72 X1.2@74.195,129.62
+27В_ЦМ1_ДВ2: K4.6 X1.15 X1.16 | length 6.6
  Top Layer w1: K4.6@101.724,150.695 105.183,150.695 v2(105.201,150.713)
  Bottom Layer w1: X1.15@91.975,129.62 91.975,130.89 X1.16@93.245,132.16
+27В_ЦМ1_ДВ3: K6.6 X2.1 X2.2 | length 6.6
  Top Layer w1: K6.6@135.974,150.695 139.433,150.695 v2(139.451,150.713)
  Bottom Layer w1: X2.1@133.245,132.16 133.245,132.018 134.415,130.848 134.415,129.72 X2.2@134.515,129.62
+27В_ЦМ1_ДВ4: K8.6 X2.15 X2.16 | length 6.6
  Top Layer w1: K8.6@160.974,150.695 164.433,150.695 v2(164.451,150.713)
  Bottom Layer w1: X2.15@152.295,129.62 152.395,129.72 152.395,130.848 153.565,132.018 X2.16@153.565,132.16
+27В_ЦМ2_ДВ1: K2.10 X1.3 X1.4 | length 6.6
  Top Layer w1: K2.10@76.5,160.708 K2.10@77.416,160.708 v2(80,160.708)
  Bottom Layer w1: X1.3@75.465,132.16 75.465,132.018 76.635,130.848 76.635,129.72 X1.4@76.735,129.62
+27В_ЦМ2_ДВ2: K4.10 X1.13 X1.14 | length 6.6
  Top Layer w1: K4.10@101.701,160.713 K4.10@102.616,160.713 v2(105.201,160.713)
  Bottom Layer w1: X1.13@89.435,129.62 89.435,130.89 X1.14@90.705,132.16
+27В_ЦМ2_ДВ3: K6.10 X2.3 X2.4 | length 6.6
  Top Layer w1: K6.10@135.951,160.713 K6.10@136.866,160.713 v2(139.451,160.713)
  Bottom Layer w1: X2.3@135.785,132.16 135.885,132.06 135.885,130.932 137.055,129.762 X2.4@137.055,129.62
+27В_ЦМ2_ДВ4: K8.10 X2.13 X2.14 | length 6.6
  Top Layer w1: K8.10@160.951,160.713 K8.10@161.866,160.713 v2(164.451,160.713)
  Bottom Layer w1: X2.13@149.755,129.62 149.855,129.72 149.855,130.848 151.025,132.018 X2.14@151.025,132.16
+Б/С: R18.2 R19.2 R37.2 R38.2 R56.2 R57.2 R75.2 R76.2 U1.1 U2.1 U3.1 U4.1 VD2.1 VD2.2 VD2.3 VD2.4 VD2.5 VD2.6 VD2.7 VD2.8 VD4.1 VD4.2 VD4.3 VD4.4 VD4.5 VD4.6 VD4.7 VD4.8 VD6.1 VD6.2 VD6.3 VD6.4 VD6.5 VD6.6 VD6.7 VD6.8 VD8.1 VD8.2 VD8.3 VD8.4 VD8.5 VD8.6 VD8.7 VD8.8 X3.3 X3.4 | length 91.9
  Top Layer w0.5: U1.1@72.641,206.329 72.641,205.745 72.966,205.42 U1.1@75.75,205.42 R19.2@78.366,205.42 v2(78.366,203.745) ; U2.1@97.841,206.334 97.841,205.75 98.166,205.425 U2.1@100.951,205.425 R38.2@103.566,205.425 v2(103.566,203.75) ; U3.1@132.091,206.334 132.091,205.75 132.416,205.425 U3.1@135.201,205.425 R57.2@137.816,205.425 v2(137.816,203.75) ; U4.1@157.091,206.334 157.091,205.75 157.416,205.425 U4.1@160.201,205.425 R76.2@162.816,205.425 v2(162.816,203.75)
  GND w0.5: 78.5,202.25 78.5,203.611 v2(78.366,203.745) 78.5,203.879 78.5,205.25 ; 103.5,202.25 103.5,203.684 v2(103.566,203.75) 103.5,203.816 103.5,205.5 ; 137.75,202 137.75,203.684 v2(137.816,203.75) 137.75,203.816 137.75,205.5
  GND w0.75: X3.3@121.803,216.84 X3.4@121.803,218.84
  Bottom Layer w0.5: v2(78.366,203.745) R18.2@78.366,205.42 ; v2(103.566,203.75) R37.2@103.566,205.425 ; v2(137.816,203.75) R56.2@137.816,205.425 ; v2(162.816,203.75) R75.2@162.816,205.425
  Bottom Layer w0.75: v2@75.139,181.889 VD2.8@75.139,183.189 VD2.7@75.139,184.459 VD2.6@75.139,185.729 VD2.5@75.139,186.999 VD2.4@75.139,188.269 VD2.3@75.139,189.539 VD2.2@75.139,190.809 VD2.1@75.139,192.079 ; v2@100.34,181.894 VD4.8@100.34,183.194 VD4.7@100.34,184.464 VD4.6@100.34,185.734 VD4.5@100.34,187.004 VD4.4@100.34,188.274 VD4.3@100.34,189.544 VD4.2@100.34,190.814 VD4.1@100.34,192.084 ; v2@134.59,181.894 VD6.8@134.59,183.194 VD6.7@134.59,184.464 VD6.6@134.59,185.734 VD6.5@134.59,187.004 VD6.4@134.59,188.274 VD6.3@134.59,189.544 VD6.2@134.59,190.814 VD6.1@134.59,192.084 ; v2@159.59,181.894 VD8.8@159.59,183.194 VD8.7@159.59,184.464 VD8.6@159.59,185.734 VD8.5@159.59,187.004 VD8.4@159.59,188.274 VD8.3@159.59,189.544 VD8.2@159.59,190.814 VD8.1@159.59,192.084
  other v2: 75.139,181.755 100.34,181.76 134.59,181.76 159.59,181.76
A: R15.1 R34.1 R53.1 R72.1 X3.7 X3.8 | length 116.6
  Top Layer w0.3: v1@58.861,201.409 R15.1@59.966,201.409 ; v1@84.061,201.414 R34.1@85.166,201.414 ; v1@118.308,201.417 118.308,202.558 120,204.25 135.75,204.25 138.586,201.414 R72.1@144.416,201.414 ; v1@118.311,201.414 R53.1@119.416,201.414
  Signal w0.3: v1(58.858,201.409) 59.948,202.5 84,202.5 ; v1(84.058,201.414) 84.039,201.433 84.039,202.461 84,202.5 ; v1(118.308,201.414) 117.222,202.5 ; X3.8@125.803,218.84 X3.7@125.803,216.84 125.803,206.303 122,202.5 117.222,202.5 ; 84,202.5 117.222,202.5
B: R13.1 R32.1 R51.1 R70.1 X3.9 X3.10 | length 117.1
  Top Layer w0.3: R13.1@80.366,200.139 80.371,200.145 v1(81.458,200.145) ; R32.1@105.566,200.144 105.572,200.15 v1(106.658,200.15) ; R51.1@139.816,200.144 139.822,200.15 v1(140.908,200.15) 145.032,200.15 v1(146.316,198.866) ; R70.1@164.816,200.144 164.822,200.15 v1(165.908,200.15)
  Signal w0.3: v1(81.458,200.145) 82.603,199 105.508,199 v1(106.658,200.15) 122.65,200.15 127.803,205.303 127.803,211.072 ; X3.10@127.803,218.84 X3.9@127.803,216.84 127.803,211.072 ; v1(128.5,211) 128.443,211.057 127.817,211.057 127.803,211.072 ; v1(146.316,198.866) 164.624,198.866 v1(165.908,200.15)
  Bottom Layer w0.3: v1(128.5,211) 138.884,211 142,207.884 142,201.242 v1(140.908,200.15)
C: R11.1 R30.1 R49.1 R68.1 X3.11 X3.12 | length 127.4
  Top Layer w0.3: v1(58.858,197.599) R11.1@59.966,197.599 ; v1(84.058,197.604) R30.1@85.166,197.604 ; v1(118.308,197.604) R49.1@119.416,197.604 ; v1(143.308,197.604) R68.1@144.416,197.604
  Signal w0.3: v1(58.858,197.599) 58.901,197.599 61.106,195.394 74.754,195.394 76.965,197.604 v1(84.058,197.604) 84.104,197.604 85.5,196.209 86.709,195 99,195 101.604,197.604 v1(118.308,197.604) 119.604,197.604 120.75,198.75 123.75,198.75 129.9,204.9 129.9,216.743 X3.11@129.803,216.84 X3.12@129.803,218.84
  Bottom Layer w0.3: v1(118.308,197.604) 118.308,195.192 120.65,192.85 136.1,192.85 138,194.75 141.5,194.75 143.308,196.558 v1(143.308,197.604)
D: R1.1 R20.1 R39.1 R58.1 X4.1 X4.2 | length 120.6
  Top Layer w0.3: R1.1@80.366,196.329 v1(81.458,196.329) ; R20.1@105.566,196.334 v1(106.658,196.334) ; v1(134.5,193.5) 136.25,193.5 137.5,194.75 141,194.75 ; R39.1@139.566,195.816 139.566,196.084 R39.1@139.816,196.334 v1(140.908,196.334) 140.908,194.842 141,194.75 ; v1(146.316,194.75) 141,194.75 ; R58.1@164.816,196.334 v1(165.908,196.334)
  Signal w0.3: v1(81.458,196.329) 84.037,193.75 102,193.75 104.584,196.334 v1(106.658,196.334) 122.18,196.334 125.334,196.334 ; X4.2@131.803,218.84 X4.1@131.803,216.84 131.803,202.803 125.334,196.334 ; v1(134.5,193.5) 128.169,193.5 125.334,196.334 ; v1@146.5,194.75 161.161,194.75 162.745,196.334 v1(165.908,196.334)
E1: R5.1 R12.1 R14.1 R16.1 X4.3 | length 94
  Bottom Layer w0.3: R14.1@59.966,200.139 R5.1@59.966,196.329 59.966,195.034 61.25,193.75 77.5,193.75 80.302,196.552 80.302,197.536 R12.1@80.366,197.599 R16.1@80.366,201.409 R16.1@80.364,201.411 ; 80.364,203.107 91.007,213.75 132.75,213.75 133.803,214.803 X4.3@133.803,216.84 ; R16.1@80.366,201.411 80.366,203.107
E2: R24.1 R31.1 R33.1 R35.1 X4.5 | length 94.4
  Bottom Layer w0.3: R35.1@105.566,201.414 R31.1@105.566,197.604 105.503,197.541 105.503,196.557 102.701,193.755 86.451,193.755 85.166,195.039 R24.1@85.166,196.334 R33.1@85.166,200.144 85.166,205.416 92,212.25 134.106,212.25 135.803,213.947 X4.5@135.803,216.84
E3: R43.1 R50.1 R52.1 R54.1 X4.7 | length 54.2
  Bottom Layer w0.3: R52.1@119.416,200.144 R43.1@119.416,196.334 119.416,195.072 120.338,194.15 136.586,194.15 R50.1@139.491,197.055 ; X4.7@137.803,216.84 137.803,213.947 143.25,208.5 143.25,199.75 141.104,197.604 R50.1@139.816,197.604 R54.1@139.816,201.414
E4: R62.1 R69.1 R71.1 R73.1 X4.9 | length 50.6
  Bottom Layer w0.3: X4.9@139.803,216.84 139.803,213.697 144.416,209.084 R71.1@144.416,200.144 R62.1@144.416,196.334 144.416,195.039 145.701,193.755 161.951,193.755 164.753,196.557 164.753,197.541 R69.1@164.816,197.604 R73.1@164.816,201.414
GND: R17.1 R36.1 R55.1 R74.1 U1.3 U2.3 U3.3 U4.3 VT1.3 VT1.6 VT1.10 VT1.13 VT2.3 VT2.6 VT2.10 VT2.13 VT3.3 VT3.6 VT3.10 VT3.13 VT4.3 VT4.6 VT4.10 VT4.13 VT5.3 VT5.6 VT5.10 VT5.13 VT6.3 VT6.6 VT6.10 VT6.13 VT7.3 VT7.6 VT7.10 VT7.13 VT8.3 VT8.6 VT8.10 VT8.13 X1.17 X1.18 X1.19 X1.20 X1.28 X1.29 X1.30 X1.31 X2.17 X2.18 X2.19 X2.20 X2.28 X2.29 X2.30 X2.31 X3.1 X3.2 X3.5 X3.6 | length 173.8
  Top Layer w0.3: v1(58.858,209.23) R17.1@59.966,209.23 ; VT2.10@65.297,200.139 v3(68.316,200.139) ; VT2.13@65.331,196.295 VT2.13@65.297,196.329 v3(68.316,196.329) ; v3(72.391,197.599) VT2.3@75.203,197.599 ; v3(72.391,201.409) VT2.6@75.203,201.409 ; U1.3@72.6,207.67 U1.3@72.7,207.67 74.399,207.67 74.689,207.96 U1.3@75.65,207.96 ; U1.3@76.741,207.96 U1.3@75.75,207.96 75.793,207.917 78.138,207.917 78.164,207.943 78.443,207.943 v1@78.5,208 ; v1(84.058,209.235) R36.1@85.166,209.235 ; VT4.10@90.498,200.144 v3(93.516,200.144) ; VT4.13@90.532,196.3 VT4.13@90.498,196.334 v3(93.516,196.334) ; v3(97.5,201.5) 97.586,201.414 VT4.6@100.404,201.414 ; v3(97.591,197.604) VT4.3@100.404,197.604 ; U2.3@97.801,207.675 U2.3@97.901,207.675 99.5,207.675 99.79,207.965 U2.3@100.851,207.965 ; U2.3@100.951,207.965 103.465,207.965 v1@103.5,208 ; v1(118.308,209.235) R55.1@119.416,209.235 ; VT6.10@124.748,200.144 v3(127.766,200.144) ; VT6.13@124.782,196.3 VT6.13@124.748,196.334 v3(127.766,196.334) ; v3(131.841,197.604) VT6.3@134.654,197.604 ; v3(131.841,201.414) VT6.6@134.654,201.414 ; U3.3@132.051,207.675 U3.3@132.151,207.675 133.75,207.675 134.04,207.965 U3.3@135.101,207.965 ; v1@144.397,210.565 144.407,210.556 144.407,209.244 R74.1@144.416,209.235 ; VT8.10@149.748,200.144 v3(152.766,200.144) ; VT8.13@149.782,196.3 VT8.13@149.748,196.334 v3(152.766,196.334) ; v3(156.841,197.604) VT8.3@159.654,197.604 ; v3(156.841,201.414) VT8.6@159.654,201.414 ; U4.3@157.051,207.675 U4.3@157.151,207.675 158.75,207.675 159.04,207.965 U4.3@160.101,207.965
  Top Layer w0.5: U1.3@75.65,207.96 U1.3@75.655,207.965 ; U2.3@100.851,207.965 U2.3@100.861,207.975 ; U2.3@100.951,207.965 U2.3@100.956,207.97 ; U3.3@135.101,207.965 135.111,207.975 v1(137.816,207.975) ; U4.3@160.101,207.965 160.111,207.975 v1(162.816,207.975)
  Bottom Layer w0.3: VT1.3@65.297,197.599 v3(72.391,197.599) 73.661,196.329 VT1.13@75.203,196.329 ; VT1.6@65.297,201.409 v3(72.391,201.409) ; v3(68.316,200.139) VT1.10@75.203,200.139 ; VT3.3@90.498,197.604 v3(97.591,197.604) 97.591,197.415 97.865,197.141 97.865,197.135 98.666,196.334 VT3.13@100.404,196.334 ; VT3.6@90.498,201.414 v3@97.5,201.414 ; v3(93.516,200.144) VT3.10@100.404,200.144 ; VT5.3@124.748,197.604 v3(131.841,197.604) 133.111,196.334 VT5.13@134.654,196.334 ; VT5.6@124.748,201.414 v3(131.841,201.414) ; v3(127.766,200.144) VT5.10@134.654,200.144 ; VT7.3@149.748,197.604 v3(156.841,197.604) 158.111,196.334 VT7.13@159.654,196.334 ; VT7.6@149.748,201.414 v3(156.841,201.414) ; v3(152.766,200.144) VT7.10@159.654,200.144
  other v1: 78.366,207.96 103.566,207.965 144.416,210.565
I1: R17.2 U1.7 X4.4 | length 77.8
  Top Layer w0.3: U1.7@64.65,209.23 U1.7@64.75,209.23 67.499,209.23 67.7,209.029 U1.7@67.7,208.32 ; 67.48,209.23 78.25,220 132.643,220 X4.4@133.803,218.84
  Top Layer w0.5: R17.2@61.991,209.17 62.039,209.219 64.639,209.219 U1.7@64.65,209.23
I2: R36.2 U2.7 X4.6 | length 54.5
  Top Layer w0.2: 134.534,216.034 134.817,216.317 134.817,217.854 X4.6@135.803,218.84
  Top Layer w0.3: U2.7@89.851,209.235 U2.7@89.951,209.235 92.7,209.235 ; U2.7@92.901,208.325 92.901,209.034 92.7,209.235 ; 134.534,216.034 133.75,215.25 98.715,215.25 92.7,209.235
  Top Layer w0.5: R36.2@87.191,209.175 87.24,209.224 89.839,209.224 U2.7@89.851,209.235
I3: R55.2 U3.7 X4.8 | length 22.7
  Top Layer w0.2: 136.789,215.75 136.789,217.826 X4.8@137.803,218.84
  Top Layer w0.3: U3.7@124.101,209.235 U3.7@124.201,209.235 126.95,209.235 ; U3.7@127.151,208.325 127.151,209.034 126.95,209.235 ; 136.789,215.75 136.789,215.461 130.563,209.235 126.95,209.235
  Top Layer w0.5: R55.2@121.441,209.175 121.49,209.224 124.089,209.224 U3.7@124.101,209.235
I4: R74.2 U4.7 X4.10 | length 21.3
  Top Layer w0.2: 139,215.75 138.817,215.933 138.817,217.854 X4.10@139.803,218.84
  Top Layer w0.3: 139,215.75 141.625,213.125 144.375,213.125 146.316,211.184 R74.2@146.316,209.235 ; U4.7@149.101,209.235 151.95,209.235 152.151,209.034 U4.7@152.151,208.325
  Top Layer w0.5: R74.2@146.441,209.175 146.49,209.224 149.089,209.224 U4.7@149.101,209.235
KS_1: X1.21 X4.19 | length 177.7
  GND w0.5: X1.21@79.275,134.7 79.471,134.896 80.009,134.896 85.5,140.387 85.5,159.5 88.5,162.5 153,162.5 156,165.5 165,165.5 168,168.5 168,190.5 166.882,191.618 166.882,211.618 165.25,213.25 151.75,213.25 149.803,215.197 X4.19@149.803,216.84
KS_2: X1.27 X2.21 | length 55.4
  Signal w0.5: X1.27@86.895,134.7 88.107,133.488 95.138,133.488 97.15,135.5 129.36,135.5 131.372,133.488 138.383,133.488 X2.21@139.595,134.7
KS_3: X2.27 X4.20 | length 116.5
  GND w0.5: X2.27@147.215,134.7 147.215,160.215 148.8,161.8 153.3,161.8 156.3,164.8 165.3,164.8 168.7,168.2 168.7,192.295 168.5,192.495 168.5,192.5 167.7,193.3 167.7,212.05 165.5,214.25 152.25,214.25 151,215.5 151,217.249 150.121,218.128 150.121,218.286 149.803,218.604 X4.20@149.803,218.84
NetK1_2: K1.2 K1.7 R18.1 R19.1 U1.10 | length 36.4
  Top Layer w0.3: v1(63.076,205.455) 63.078,205.458 64.712,205.458 U1.10@64.75,205.42 67.334,205.42 67.7,205.786 U1.10@67.7,206.37
  Top Layer w0.5: R19.1@80.266,205.42 v2(80.266,207.97)
  Top Layer w0.7: K1.2@76.785,176.402 79.259,176.402 ; K1.7@77.416,170.152 79.259,170.152 v2@80.441,168.97 ; 79.24,176.402 v2@80.441,177.602
  Bottom Layer w0.3: v1(63.076,205.455) 64.62,207 79.296,207 v2(80.266,207.97)
  Bottom Layer w0.5: R18.1@80.266,205.42 v2(80.266,207.97)
  other v2: 80.266,168.97 80.266,177.602
NetK1_6: K1.6 K2.2 | length 17.6
  Top Layer w1: K1.6@78.241,167.652 K1.6@77.416,167.652 73.616,167.652 73.541,167.577 73.541,159.458 K2.2@76.766,159.458 K2.2@78.333,159.458
NetK1_10: K1.10 K2.7 | length 35.3
  Top Layer w0.3: v2(72.991,177.695) v2@73.034,177.652
  Top Layer w1: v2@72.991,153.22 73.003,153.208 K2.7@77.416,153.208 K2.7@78.333,153.208 ; v2@73.034,177.652 K1.10@77.416,177.652 K1.10@78.416,177.652
  Bottom Layer w1: v2@72.991,153.22 v2@72.991,177.67 ; v2(72.991,177.695) v2@73.016,177.67
  other v2: 72.991,153.208
NetK3_2: K3.2 K3.7 R37.1 R38.1 U2.10 | length 36.4
  Top Layer w0.3: v1(88.276,205.46) 88.279,205.463 89.913,205.463 U2.10@89.951,205.425 92.535,205.425 92.901,205.791 U2.10@92.901,206.375
  Top Layer w0.5: R38.1@105.466,205.425 v2(105.466,207.975)
  Top Layer w0.7: K3.2@101.985,176.407 104.46,176.407 ; K3.7@102.616,170.157 104.46,170.157 v2@105.641,168.975 ; 104.441,176.407 v2@105.641,177.607
  Bottom Layer w0.3: v1(88.276,205.46) 89.821,207.005 104.496,207.005 v2(105.466,207.975)
  Bottom Layer w0.5: R37.1@105.466,205.425 v2(105.466,207.975)
  other v2: 105.466,168.975 105.466,177.607
NetK3_6: K3.6 K4.2 | length 17.6
  Top Layer w1: K3.6@103.441,167.657 K3.6@102.616,167.657 98.816,167.657 98.741,167.582 98.741,159.463 K4.2@101.966,159.463 K4.2@103.534,159.463
NetK3_10: K3.10 K4.7 | length 35.3
  Top Layer w0.3: v2(98.191,177.7) v2@98.235,177.657
  Top Layer w1: v2@98.191,153.225 98.203,153.213 K4.7@102.616,153.213 K4.7@103.534,153.213 ; v2@98.235,177.657 K3.10@102.616,177.657 K3.10@103.616,177.657
  Bottom Layer w1: v2@98.191,153.225 v2@98.191,177.675 ; v2(98.191,177.7) v2@98.216,177.675
  other v2: 98.191,153.213